# Altium PCB STAC_Breakout_PCB.PcbDoc
Units mil, origin at the board's own origin, x right, y up, seen from the top; angles counter-clockwise.
Board outline 1890 x 1880 mil, 2 copper layers (Top Layer, Bottom Layer); 4 components, 65 nets, 130 pads, 1 vias.
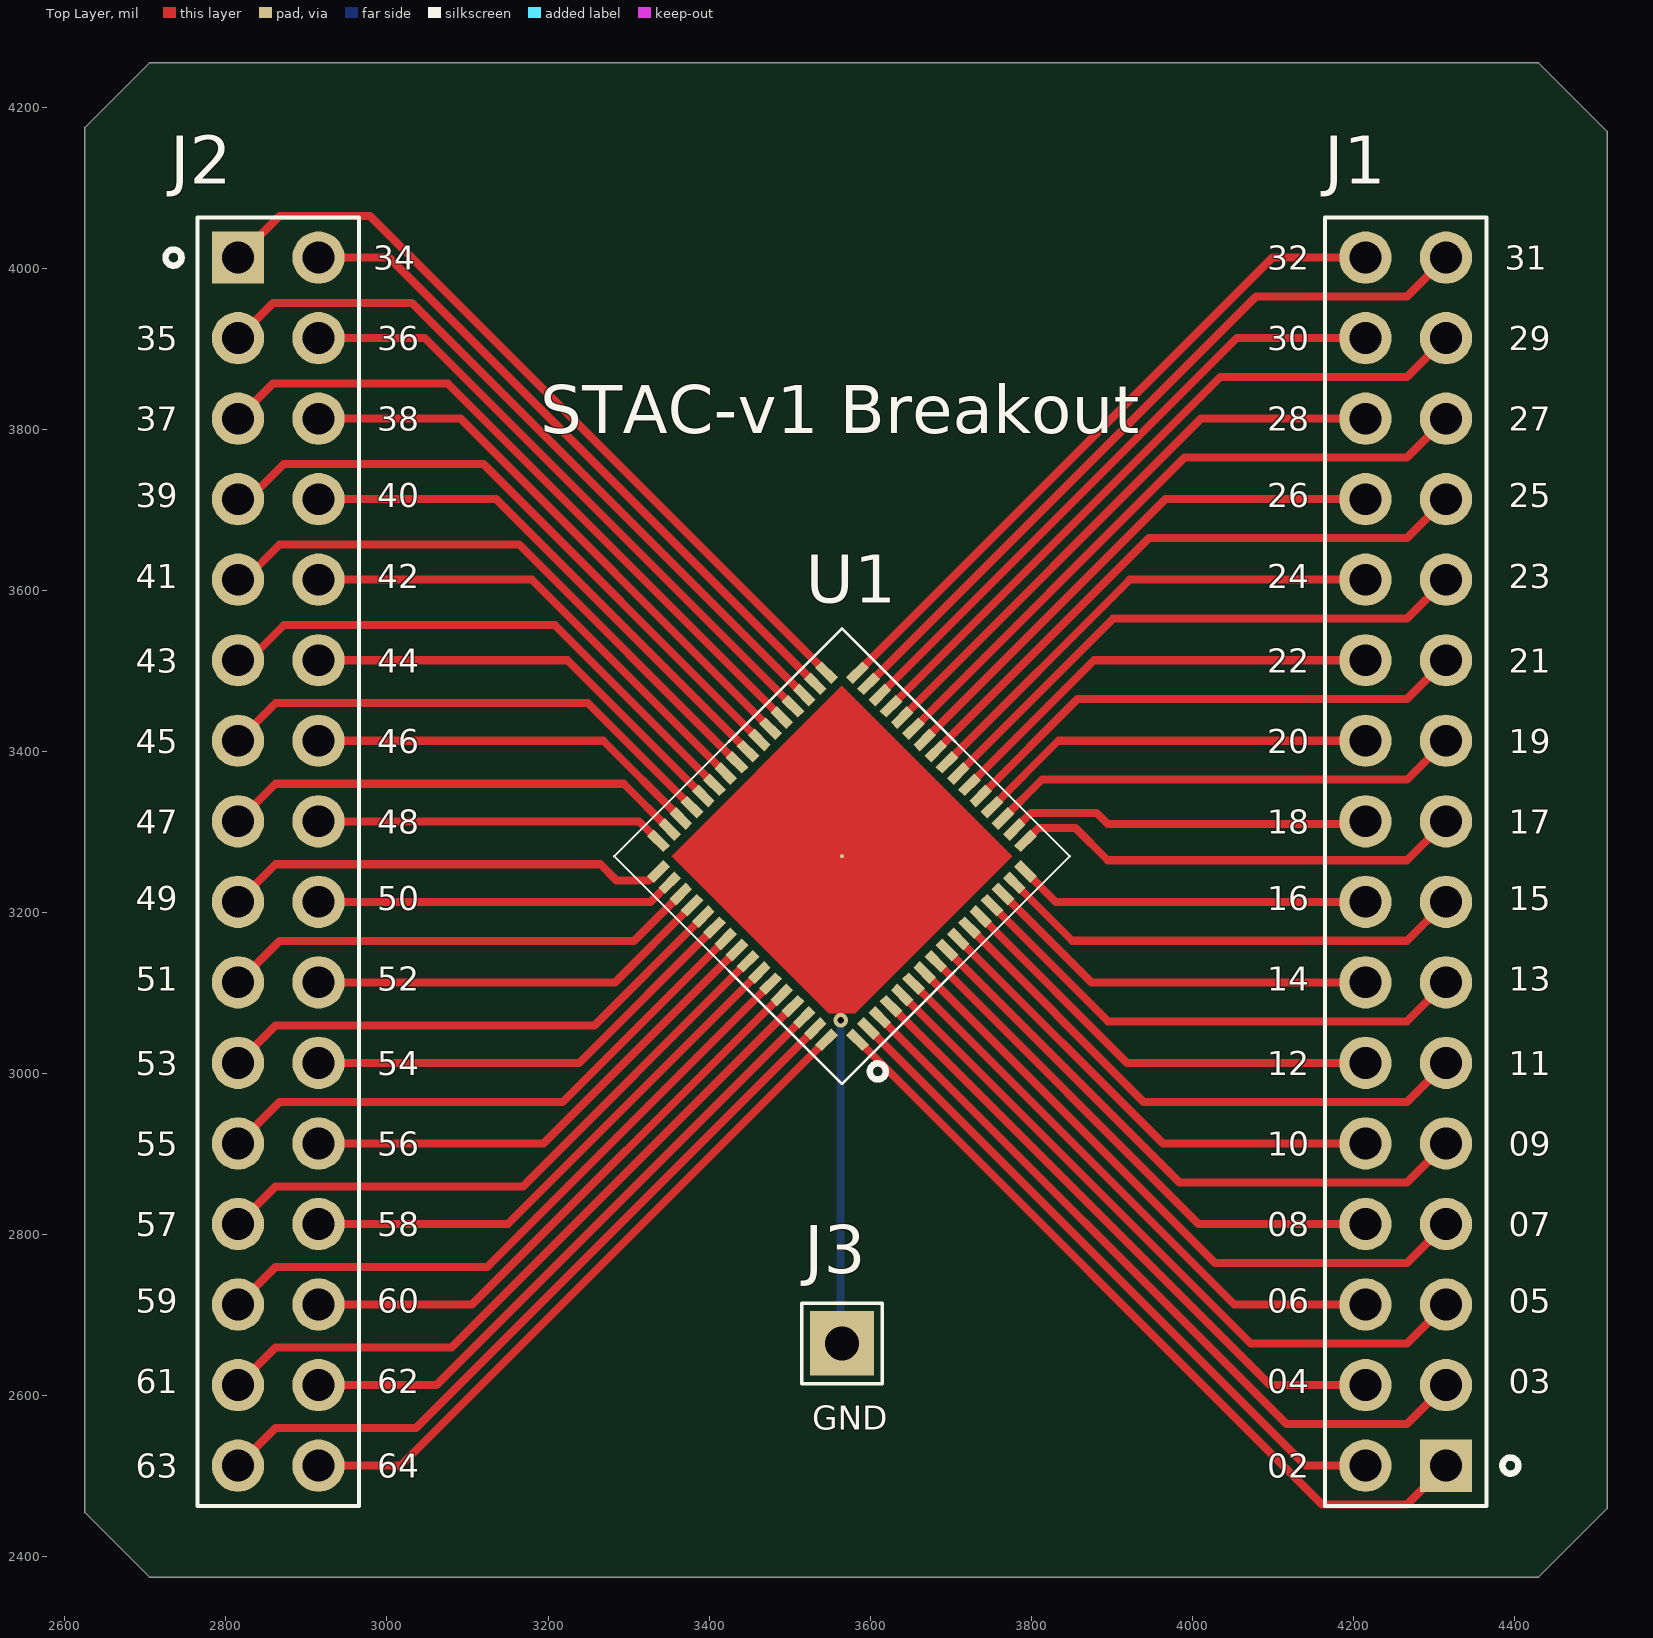
[diagram p0: Top Layer view]
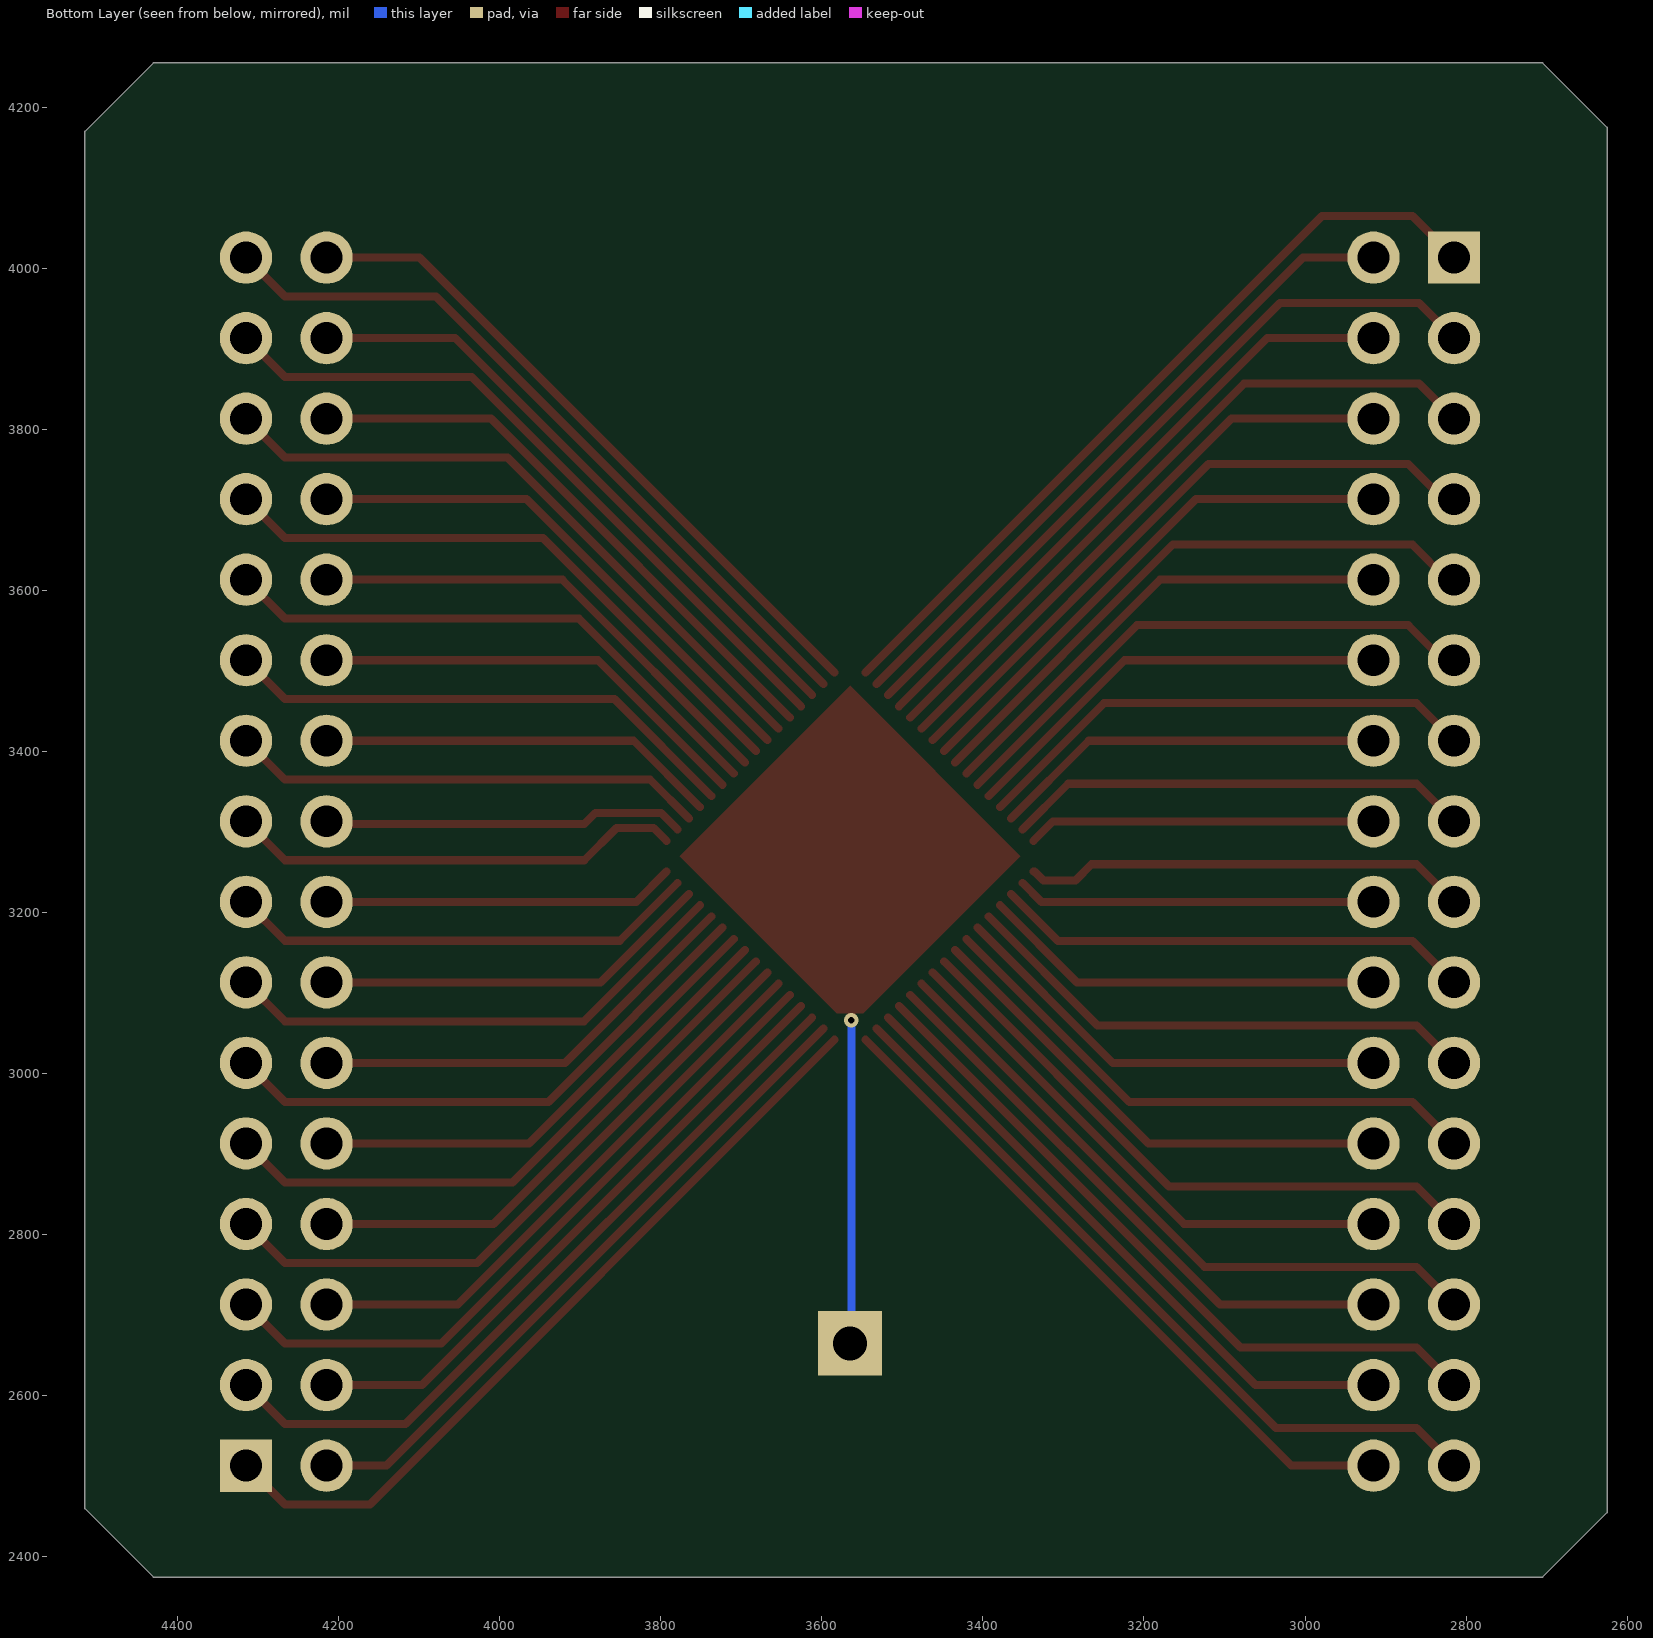
[diagram p1: Bottom Layer view, seen from below]

## Layer stack, top to bottom
Top Solder: solder mask 0.4, Solder Resist, Dk 3.5
Top Layer: signal copper 1.4
Dielectric 1: dielectric 12.6, FR-4, Dk 4.8
Bottom Layer: signal copper 1.4
Bottom Solder: solder mask 0.4, Solder Resist, Dk 3.5

## Board outline
2625,2455 2625,4175 2705,4255 4430,4255 4515,4170 4515,2460 4430,2375 2705,2375

## Design rules (kind name [scope] priority, off if disabled: settings)
Clearance [All] p1: gap=6 ignorepadtopadclearanceinfootprint=FALSE
PolygonConnect [All] p1: connectstyle=Relief reliefconductorwidth=10 reliefentries=4 polygonreliefangle="90 Angle" airgapwidth=10
RoutingVias [All] p1: holewidth=28 width=50 viastyle="Through Hole" minholewidth=28 minwidth=50 maxholewidth=28 maxwidth=50
SolderMaskExpansion [All] p1: expansion=4 istentingtop=FALSE
Width [All] p1: maxlimit=10 minlimit=6 preferedwidth=10
30 further rules are at their usual default settings.

## Components (designator, comment, footprint, x,y, rotation, side; value= is the part's Value field where it differs from the comment)
J1 "CON_032pin_2x16" CON-032-100-1600X200/2X16-POST 4265.01,2863.34 r90 top
J2 "CON_032pin_2x16" CON-032-100-1600X200/2X16-POST 2865,3663.35 r270 top
J3 "CON_001pin_1x1" CON-001-100-100X100/1X1-POST 3565,2665 r0 top
U1 "TESTCHIP_STAC_v1" STAC-QFN-64-.5-9.0X9.0/THERM-7.6 3565,3270 r45 top

## Footprints (in the part's own frame and the unit in brackets; to place one, negate y for a bottom-side part, rotate by r counter-clockwise, add the part's x,y. Pads: shape width x height; smd on the part's side, far side on the other; paste and mask are expansions set on the pad)
CON-001-100-100X100/1X1-POST [mil] "1 pin"
  rect 80x80 hole 42 mask+0: 1(0,0)
  silkscreen extent -50,-50 50,50, body extent -46,-46 46,46, height 320
CON-032-100-1600X200/2X16-POST [mil]
  rect 64.97x64.97 hole 39.38 mask+0: 1(-350,-50)
  round 65.01 hole 39.38 mask+0: 2(-350,50.01) 3(-250,-50) 4(-250,50.01) 5(-150,-50) 6(-150,50.01) 7(-50,-50) 8(-50,50.01) 9(50.01,-50) 10(50.01,50.01) 11(150.01,-50) 12(150.01,50.01) 13(250.01,-50) 14(250.01,50.01) 15(350.01,-50) 16(350.01,50.01) 17(450.01,-50) 18(450.01,50.01) 19(550.01,-50) 20(550.01,50.01) 21(650.01,-50) 22(650.01,50.01) 23(750.02,-50) 24(750.02,50.01) 25(850.02,-50) 26(850.02,50.01) 27(950.02,-50) 28(950.02,50.01) 29(1050.02,-50) 30(1050.02,50.01) 31(1150.02,-50) 32(1150.02,50.01)
  silkscreen extent -400,-140 1200,100
STAC-QFN-64-.5-9.0X9.0/THERM-7.6 [mm]
  rect 0.3x0.724 smd mask+0: 1(-3.75,-4.437) 2(-3.25,-4.437) 3(-2.75,-4.437) 4(-2.25,-4.437) 5(-1.75,-4.437) 6(-1.25,-4.437) 7(-0.75,-4.437) 8(-0.25,-4.437) 9(0.25,-4.437) 10(0.75,-4.437) 11(1.25,-4.437) 12(1.75,-4.437) 13(2.25,-4.437) 14(2.75,-4.437) 15(3.25,-4.437) 16(3.75,-4.437) 33(3.75,4.437) 34(3.25,4.437) 35(2.75,4.437) 36(2.25,4.437) 37(1.75,4.437) 38(1.25,4.437) 39(0.75,4.437) 40(0.25,4.437) 41(-0.25,4.437) 42(-0.75,4.437) 43(-1.25,4.437) 44(-1.75,4.437) 45(-2.25,4.437) 46(-2.75,4.437) 47(-3.25,4.437) 48(-3.75,4.437)
  rect 0.724x0.3 smd mask+0: 17(4.437,-3.75) 18(4.437,-3.25) 19(4.437,-2.75) 20(4.437,-2.25) 21(4.437,-1.75) 22(4.437,-1.25) 23(4.437,-0.75) 24(4.437,-0.25) 25(4.437,0.25) 26(4.437,0.75) 27(4.437,1.25) 28(4.437,1.75) 29(4.437,2.25) 30(4.437,2.75) 31(4.437,3.25) 32(4.437,3.75) 49(-4.437,3.75) 50(-4.437,3.25) 51(-4.437,2.75) 52(-4.437,2.25) 53(-4.437,1.75) 54(-4.437,1.25) 55(-4.437,0.75) 56(-4.437,0.25) 57(-4.437,-0.25) 58(-4.437,-0.75) 59(-4.437,-1.25) 60(-4.437,-1.75) 61(-4.437,-2.25) 62(-4.437,-2.75) 63(-4.437,-3.25) 64(-4.437,-3.75)
  round 0.127 smd mask+0: 65(0,0)
  Top Layer region: -3.8,3.8 -3.8,-3.2 -3.2,-3.8 3.8,-3.8 3.8,3.8 -3.8,3.8
  silkscreen extent -5.08,-5.85 5.08,5.08, body extent -4.5,-4.5 4.5,4.5, height 1.5

## Part data
J3: "Con 1 pin"
U1: "TESTCHIP STAC v1"

## Via types
v1: diameter 17.99/17.99 (per signal layer), hole 8, Top Layer to Bottom Layer, tented both sides, 1 vias

## Nets (pads, with @x,y where several pads share a name; then routed paths per layer and width w, separated by ;. In a path a pad name is that pad's centre, name@x,y a point inside that pad or via, vN(x,y) a via of type N, cw(c..) or ccw(c..) an arc to the next point about the centre after c; other vN are vias at no path point)
net1: J1.1 U1.1 | length 1911.5
  Top Layer w10: J1.1 4266.67,2465 ; 4161.21,2465 4266.67,2465 ; 4161.21,2465 U1.1 4161.21,2465 ; 4161.21,2465 4266.67,2465
net2: J1.2 U1.2 | length 841.7
  Top Layer w10: U1.2 4140.71,2513.34 J1.2
net3: J1.3 U1.3 | length 1796.1
  Top Layer w10: J1.3 4266.67,2565 ; 4116.89,2565 U1.3 4116.89,2565 ; 4116.89,2565 4266.67,2565 ; 4116.89,2565 4266.67,2565
net4: J1.4 U1.4 | length 784
  Top Layer w10: U1.4 4096.39,2613.34 J1.4
net5: J1.5 U1.5 | length 1680.6
  Top Layer w10: J1.5 4266.67,2665 ; 4072.57,2665 4266.67,2665 ; 4072.57,2665 U1.5 4072.57,2665 ; 4072.57,2665 4266.67,2665
net6: J1.6 U1.6 | length 726.3
  Top Layer w10: U1.6 4052.06,2713.34 J1.6
net7: J1.7 U1.7 | length 1565.1
  Top Layer w10: J1.7 4266.67,2765 ; 4028.24,2765 4266.67,2765 ; 4028.24,2765 4266.67,2765 ; 4028.24,2765 U1.7 4028.24,2765
net8: J1.8 U1.8 | length 668.5
  Top Layer w10: U1.8 4007.74,2813.34 J1.8
net9: J1.9 U1.9 | length 1449.7
  Top Layer w10: J1.9 4266.66,2865 ; 3983.92,2865 4266.66,2865 ; 3983.92,2865 U1.9 3983.92,2865 ; 3983.92,2865 4266.66,2865
net10: J1.10 U1.10 | length 610.8
  Top Layer w10: U1.10 3963.41,2913.35 J1.10
net11: J1.11 U1.11 | length 701.3
  Top Layer w10: U1.11 3939.6,2965 4266.66,2965 J1.11
net12: J1.12 U1.12 | length 553.1
  Top Layer w10: U1.12 3919.09,3013.35 J1.12
net13: J1.13 U1.13 | length 643.6
  Top Layer w10: U1.13 3895.28,3065 4266.66,3065 J1.13
net14: J1.14 U1.14 | length 495.4
  Top Layer w10: U1.14 3874.77,3113.35 J1.14
net15: J1.15 U1.15 | length 585.8
  Top Layer w10: U1.15 3850.96,3165 4266.66,3165 J1.15
net16: J1.16 U1.16 | length 437.6
  Top Layer w10: U1.16 3830.44,3213.35 J1.16
net17: J1.17 U1.17 | length 565.3
  Top Layer w10: U1.17 3808.79,3305 3855,3305 3895,3265 4266.66,3265 J1.17
net18: J1.18 U1.18 | length 462.6
  Top Layer w10: U1.18 3799.83,3323.87 3881.13,3323.87 3895,3310 4211.65,3310 J1.18 J1.18@4207.35,3321
net19: J1.19 U1.19 | length 589.9
  Top Layer w10: U1.19 3813.11,3365 4266.66,3365 J1.19
net20: J1.20 U1.20 | length 498
  Top Layer w10: U1.20 3833.62,3413.35 J1.20
net21: J1.21 U1.21 | length 647.6
  Top Layer w10: U1.21 3857.43,3465 4266.66,3465 J1.21
net22: J1.22 U1.22 | length 555.7
  Top Layer w10: U1.22 3877.95,3513.35 J1.22
net23: J1.23 U1.23 | length 705.3
  Top Layer w10: U1.23 3901.76,3565 4266.65,3565 J1.23
net24: J1.24 U1.24 | length 613.5
  Top Layer w10: U1.24 3922.28,3613.36 J1.24
net25: J1.25 U1.25 | length 763
  Top Layer w10: U1.25 3946.08,3665 4266.65,3665 J1.25
net26: J1.26 U1.26 | length 671.2
  Top Layer w10: U1.26 3966.6,3713.36 J1.26
net27: J1.27 U1.27 | length 820.8
  Top Layer w10: U1.27 3990.4,3765 4266.65,3765 J1.27
net28: J1.28 U1.28 | length 728.9
  Top Layer w10: U1.28 4010.92,3813.36 J1.28
net29: J1.29 U1.29 | length 878.5
  Top Layer w10: U1.29 4034.73,3865 4266.65,3865 J1.29
net30: J1.30 U1.30 | length 786.6
  Top Layer w10: U1.30 4055.24,3913.36 J1.30
net31: J1.31 U1.31 | length 936.2
  Top Layer w10: U1.31 4079.05,3965 4266.65,3965 J1.31
net32: J1.32 U1.32 | length 844.4
  Top Layer w10: U1.32 4099.57,4013.36 J1.32
net33: J2.1 U1.33 | length 987.2
  Top Layer w10: J2.1 2866.65,4065 2978.79,4065 U1.33
net34: J2.2 U1.34 | length 836.2
  Top Layer w10: J2.2 3002.61,4013.35 U1.34
net35: J2.3 U1.35 | length 922.7
  Top Layer w10: J2.3 2858.51,3956.85 3031.26,3956.85 U1.35
net36: J2.4 U1.36 | length 778.5
  Top Layer w10: J2.4 3046.93,3913.35 U1.36
net37: J2.5 U1.37 | length 865
  Top Layer w10: J2.5 2858.51,3856.85 3075.58,3856.85 U1.37
net38: J2.6 U1.38 | length 720.8
  Top Layer w10: J2.6 3091.25,3813.35 U1.38
net39: J2.7 U1.39 | length 807.2
  Top Layer w10: J2.7 2828.35,3713.35 2871.85,3756.85 3119.91,3756.85 U1.39
net40: J2.8 U1.40 | length 663
  Top Layer w10: J2.8 3135.57,3713.35 U1.40
net41: J2.9 U1.41 | length 749.5
  Top Layer w10: J2.9 2823.34,3613.34 2866.84,3656.84 3164.24,3656.84 U1.41
net42: J2.10 U1.42 | length 605.3
  Top Layer w10: J2.10 3179.9,3613.34 U1.42
net43: J2.11 U1.43 | length 691.8
  Top Layer w10: J2.11 2828.34,3513.34 2871.84,3556.84 3208.56,3556.84 U1.43
net44: J2.12 U1.44 | length 547.6
  Top Layer w10: J2.12 3224.23,3513.34 U1.44
net45: J2.13 U1.45 | length 636.7
  Top Layer w10: J2.13 2861.66,3460 3249.73,3460 U1.45
net46: J2.14 U1.46 | length 489.8
  Top Layer w10: J2.14 3268.55,3413.34 U1.46
net47: J2.15 U1.47 | length 578.9
  Top Layer w10: J2.15 2861.66,3360 3294.05,3360 U1.47
net48: J2.16 U1.48 | length 432.1
  Top Layer w10: J2.16 3312.87,3313.34 U1.48
net49: J2.17 U1.49 | length 554.2
  Top Layer w10: J2.17 2861.66,3260 3265,3260 3285,3240 3324.93,3240 3335.8,3250.87 U1.49
net50: J2.18 U1.50 | length 445.8
  Top Layer w10: J2.18 3327.38,3213.34 U1.50
net51: J2.19 U1.51 | length 595.4
  Top Layer w10: J2.19 2866.5,3164.83 3306.72,3164.83 U1.51
net52: J2.20 U1.52 | length 503.5
  Top Layer w10: J2.20 3283.06,3113.34 U1.52
net53: J2.21 U1.53 | length 653.1
  Top Layer w10: J2.21 2861.66,3060 3257.56,3060 U1.53
net54: J2.22 U1.54 | length 561.2
  Top Layer w10: J2.22 3238.74,3013.34 U1.54
net55: J2.23 U1.55 | length 710.8
  Top Layer w10: J2.23 2866.67,2965 3218.24,2965 U1.55
net56: J2.24 U1.56 | length 619
  Top Layer w10: J2.24 3194.41,2913.33 U1.56
net57: J2.25 U1.57 | length 768.6
  Top Layer w10: J2.25 2861.67,2860 3168.92,2860 U1.57
net58: J2.26 U1.58 | length 676.7
  Top Layer w10: J2.26 3150.09,2813.33 U1.58
net59: J2.27 U1.59 | length 826.3
  Top Layer w10: J2.27 2861.67,2760 3124.6,2760 U1.59
net60: J2.28 U1.60 | length 734.4
  Top Layer w10: J2.28 3105.76,2713.33 U1.60
net61: J2.29 U1.61 | length 884
  Top Layer w10: J2.29 2861.67,2660 3080.27,2660 U1.61
net62: J2.30 U1.62 | length 792.2
  Top Layer w10: J2.30 3061.44,2613.33 U1.62
net63: J2.31 U1.63 | length 941.7
  Top Layer w10: J2.31 2861.67,2560 3035.95,2560 U1.63
net64: J2.32 U1.64 | length 849.9
  Top Layer w10: J2.32 3017.12,2513.33 U1.64
net65: J3.1 U1.65 | length 616.3
  Top Layer w10: v1(3563.27,3066.11) 3563.27,3273.27 3565,3275
  Bottom Layer w10: v1(3563.27,3066.11) 3563.27,2678.39 J3.1@3576.66,2665

## Silkscreen, mask and mechanical layers (free items; w line width, h text height)
Top Overlay:
  text "34" at 2983,3998 h30
  text "32" at 4093,3998 h30
  text "31" at 4388,3998 h30
  text "35" at 2688,3898 h30
  text "36" at 2988,3898 h30
  text "30" at 4093,3898 h30
  text "29" at 4393,3898 h30
  text "37" at 2688,3798 h30
  text "38" at 2988,3798 h30
  text "28" at 4093,3798 h30
  text "27" at 4393,3798 h30
  text "STAC-v1 Breakout" at 3190.07,3795 h60
  text "39" at 2688,3703 h30
  text "40" at 2988,3703 h30
  text "26" at 4093,3703 h30
  text "25" at 4393,3703 h30
  text "41" at 2688,3603 h30
  text "42" at 2988,3603 h30
  text "24" at 4093,3603 h30
  text "23" at 4393,3603 h30
  text "43" at 2688,3498 h30
  text "44" at 2988,3498 h30
  text "22" at 4093,3498 h30
  text "21" at 4393,3498 h30
  text "45" at 2688,3398 h30
  text "46" at 2988,3398 h30
  text "20" at 4093,3398 h30
  text "19" at 4393,3398 h30
  text "47" at 2688,3298 h30
  text "48" at 2988,3298 h30
  text "18" at 4093,3298 h30
  text "17" at 4393,3298 h30
  text "49" at 2688,3203 h30
  text "50" at 2988,3203 h30
  text "16" at 4093,3203 h30
  text "15" at 4393,3203 h30
  text "51" at 2688,3103 h30
  text "52" at 2988,3103 h30
  text "14" at 4093,3103 h30
  text "13" at 4393,3103 h30
  text "53" at 2688,2998 h30
  text "54" at 2988,2998 h30
  text "12" at 4093,2998 h30
  text "11" at 4393,2998 h30
  text "55" at 2688,2898 h30
  text "56" at 2988,2898 h30
  text "10" at 4093,2898 h30
  text "09" at 4393,2898 h30
  text "57" at 2688,2798 h30
  text "58" at 2988,2798 h30
  text "08" at 4093,2798 h30
  text "07" at 4393,2798 h30
  text "59" at 2688,2703 h30
  text "60" at 2988,2703 h30
  text "06" at 4093,2703 h30
  text "05" at 4393,2703 h30
  text "61" at 2688,2603 h30
  text "62" at 2988,2603 h30
  text "04" at 4093,2603 h30
  text "03" at 4393,2603 h30
  text "GND" at 3528,2558 h30
  text "63" at 2688,2498 h30
  text "64" at 2988,2498 h30
  text "02" at 4093,2498 h30